# Altium PCB PCB1.PcbDoc (part 2 of 2)
Units mil, origin at the board's own origin, x right, y up, seen from the top; angles counter-clockwise.
Board outline 12061.74 x 5475 mil, 2 copper layers (Top Layer, Bottom Layer); 155 components, 105 nets, 597 pads, 54 vias.
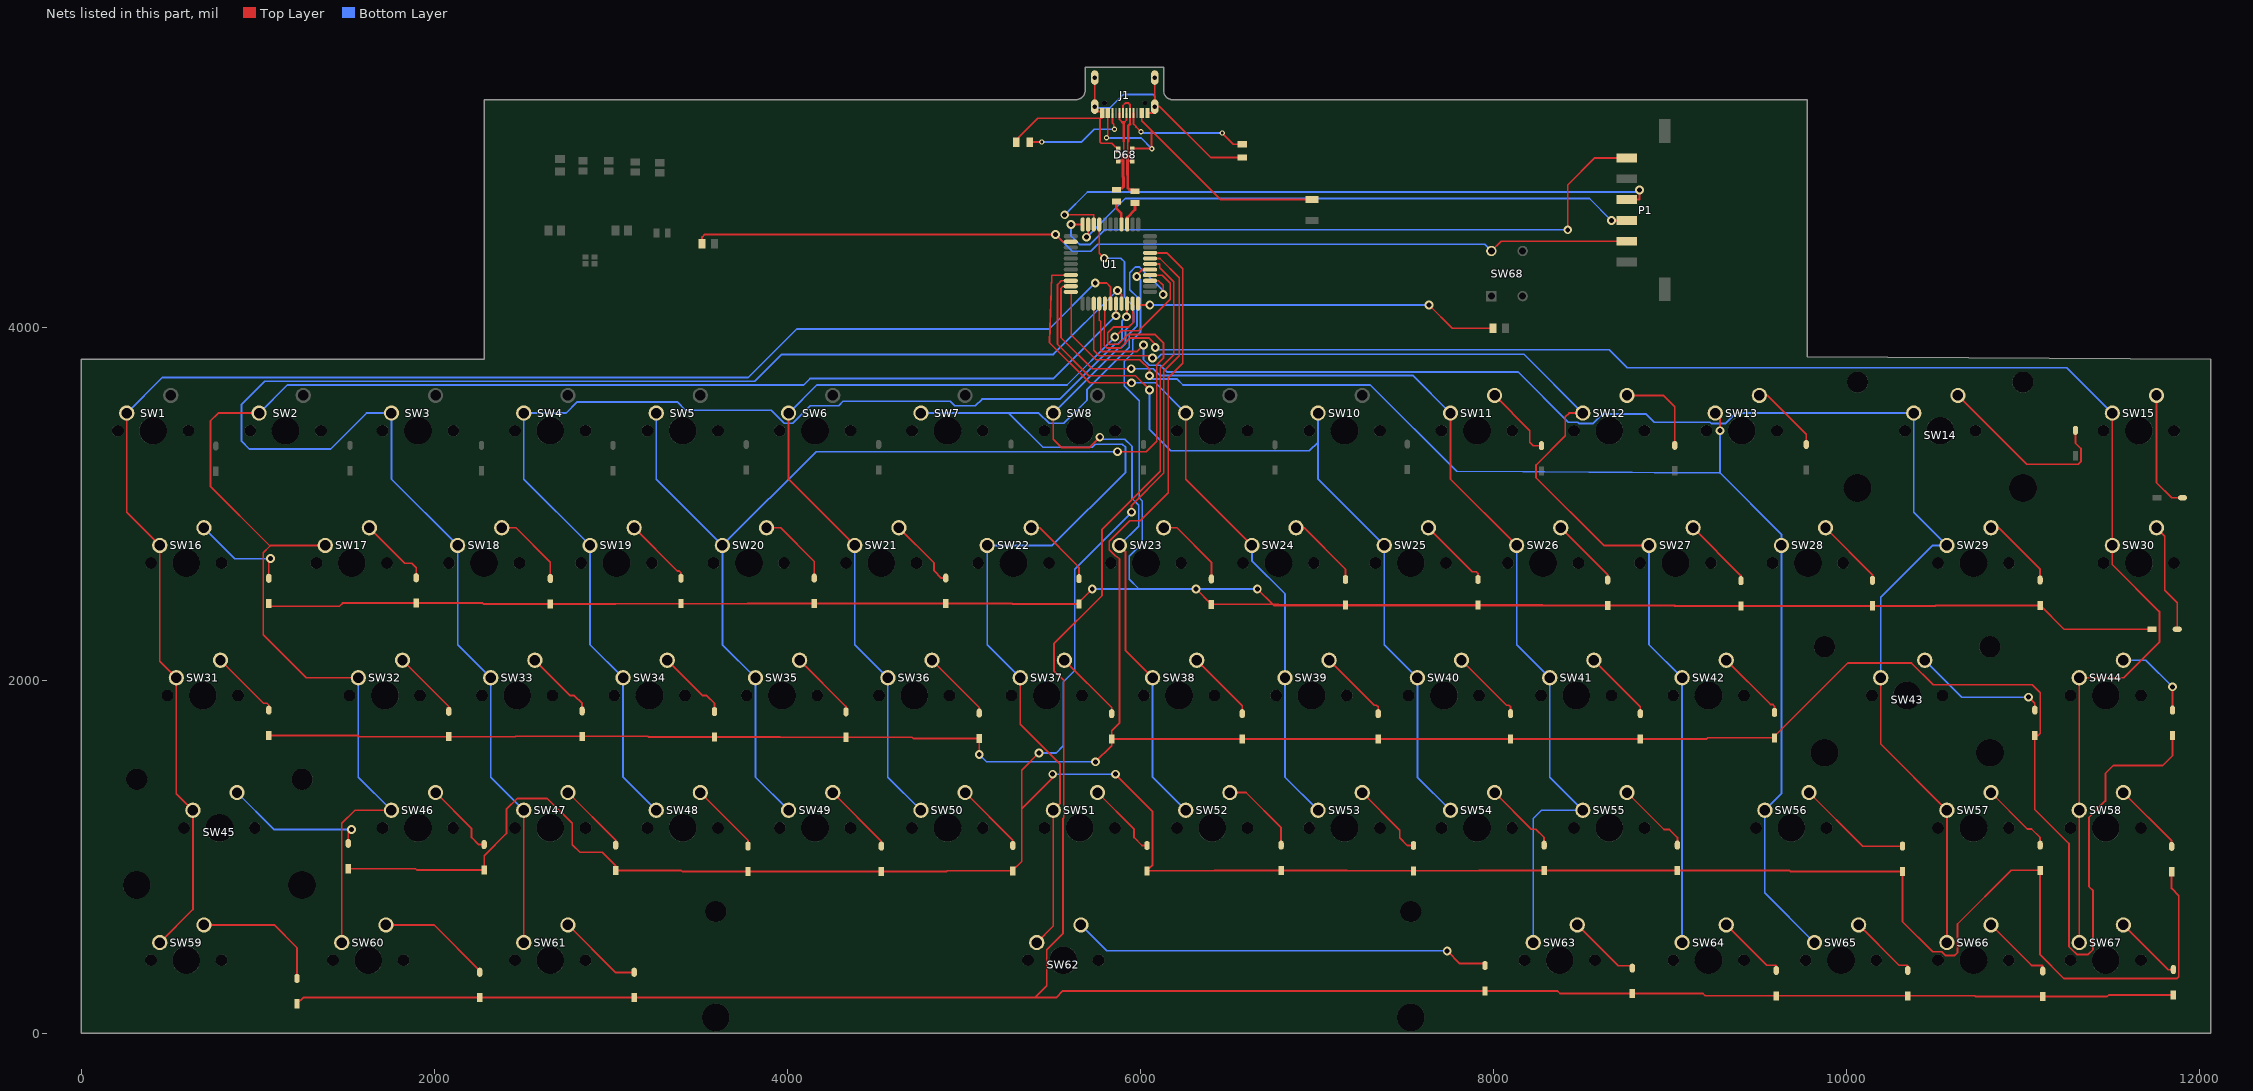
[diagram p2: the nets of this part, all layers, seen from the top]

## Via types
v1: diameter 50, hole 28, Top Layer to Bottom Layer, 48 vias
v2: diameter 30, hole 15, Top Layer to Bottom Layer, 6 vias

## Nets (pads, with @x,y where several pads share a name; then routed paths per layer and width w, separated by ;. In a path a pad name is that pad's centre, name@x,y a point inside that pad or via, vN(x,y) a via of type N, cw(c..) or ccw(c..) an arc to the next point about the centre after c; other vN are vias at no path point) (continued)
NetD11_2: D11.2 SW11.1 | length 421.7
  Top Layer w10: SW11.1@8005.75,3614.71 8205.31,3415.15 8205.31,3350 8225.31,3330 D11.2@8271.31,3330
NetD12_2: D12.2 SW12.1 | length 515.6
  Top Layer w10: SW12.1@8755.71,3614.71 8961.6,3614.71 9026.31,3550 D12.2@9026.31,3331.85
NetD13_2: D13.2 SW13.1 | length 414.3
  Top Layer w10: SW13.1@9505.66,3614.71 9550.66,3614.71 9771.31,3394.05 D13.2@9771.31,3336.85
NetD14_2: D14.2 SW14.1 | length 1054.1
  Top Layer w10: SW14.1@10630.59,3614.71 11020.3,3225 11312.31,3225 11327.31,3240 11327.31,3314 11296.31,3345 D14.2@11296.31,3416.85
NetD15_2: D15.2 SW15.1 | length 677.1
  Top Layer w10: SW15.1@11755.52,3614.71 11755.52,3120.8 11841.31,3035 D15.2@11903.16,3035
NetD16_1: D16.1 D17.1 D18.1 D19.1 D20.1 D21.1 D22.1 D23.1 D24.1 D25.1 D26.1 D27.1 D28.1 D29.1 D30.1 U1.38 | length 16335.3
  Top Layer w10: D16.1@1061.31,2435 1061.31,2420.38 1461.69,2420.38 1479.46,2438.15 D17.1@1896.31,2438.15 2273.31,2438.15 2278.31,2433.15 D18.1@2656.31,2433.15 3025.31,2433.15 3027.16,2435 D19.1@3396.31,2435 3772.31,2435 3773.61,2436.3 D20.1@4151.31,2436.3 D21.1@4896.31,2436.3 5271.31,2436.3 5274.46,2433.15 D22.1@5651.31,2433.15 5651.31,2443 v1(5726.31,2518) ; v1(5978.31,4289) 5978.31,4297 6008.82,4327.5 U1.38@6053.72,4327.5 ; v1(6314.61,2518) D23.1@6401.31,2431.3 6748.01,2431.3 ; v1(6661.31,2518) 6748.01,2431.3 ; D28.1@10146.34,2421 10505.31,2425 ; D30.1@11729.46,2290 11231.31,2290 D29.1@11096.31,2425 10505.31,2425 ; 6748.01,2431.3 6754.31,2425 8279.46,2425 ; 6748.01,2431.3 6779.31,2431.3 6782.46,2428.15 D24.1@7161.31,2428.15 D25.1@7911.31,2428.15 8276.31,2428.15 8279.46,2425 ; 8279.46,2425 D26.1@8646.31,2425 9021.31,2425 ; 9021.31,2425 9025.01,2421.3 9029.01,2421.3 ; 9021.31,2425 9025.31,2425 9029.01,2421.3 ; 9029.01,2421.3 D27.1@9401.31,2421.3 9772.31,2421.3 9774.16,2423.15 D28.1@10146.31,2423.15 D28.1@10146.31,2421 ; 9029.01,2421.3 9029.31,2421 D28.1@10146.31,2421 ; D28.1@10146.31,2421 10501.31,2421 10505.31,2425
  Bottom Layer w10: v1(5726.31,2518) 5991.31,2518 ; v1(5978.31,4289) 6000.31,4267 6000.31,3976.13 5955.35,3931.17 5955.35,3854.85 5907.31,3806.82 5907.31,3670 5992.31,3585 5992.31,3033.65 6009.31,3016.65 6009.31,2775.77 5936.31,2702.77 5936.31,2573 5991.31,2518 ; v1(6661.31,2518) v1(6314.61,2518) 5991.31,2518
NetD16_2: D16.2 SW16.1 | length 564
  Top Layer w10: D16.2@1061.31,2578.7 1061.31,2681 v1(1070.31,2690)
  Bottom Layer w10: SW16.1@693.71,2864.76 868.47,2690 v1(1070.31,2690)
NetD17_2: D17.2 SW17.1 | length 415.6
  Top Layer w10: SW17.1@1631.15,2864.76 1832.31,2663.6 1871.31,2663.6 1896.31,2638.6 D17.2@1896.31,2581.85
NetD18_2: D18.2 SW18.1 | length 449
  Top Layer w10: SW18.1@2381.11,2864.76 2461.56,2864.76 2656.31,2670 D18.2@2656.31,2576.85
NetD19_2: D19.2 SW19.1 | length 402.1
  Top Layer w10: SW19.1@3131.06,2864.76 3375.81,2620.01 3386.3,2620.01 3396.31,2610 D19.2@3396.31,2578.7
NetD20_2: D20.2 SW20.1 | length 443.3
  Top Layer w10: SW20.1@3881.01,2864.76 3960.56,2864.76 4151.31,2674 D20.2@4151.31,2580
NetD21_2: D21.2 SW21.1 | length 409.3
  Top Layer w10: SW21.1@4630.97,2864.76 4830.31,2665.41 4830.31,2621 4871.31,2580 D21.2@4896.31,2580
NetD22_2: D22.2 SW22.1 | length 427.4
  Top Layer w10: SW22.1@5380.92,2864.76 5427.92,2864.76 5651.31,2641.36 D22.2@5651.31,2576.85
NetD23_2: D23.2 SW23.1 | length 446.1
  Top Layer w10: SW23.1@6130.87,2864.76 6206.56,2864.76 6401.31,2670 D23.2@6401.31,2575
NetD24_2: D24.2 SW24.1 | length 435.9
  Top Layer w10: SW24.1@6880.82,2864.76 6926.56,2864.76 7161.31,2630 D24.2@7161.31,2571.85
NetD25_2: D25.2 SW25.1 | length 421.9
  Top Layer w10: SW25.1@7630.78,2864.76 7879.53,2616 7901.31,2616 7911.31,2606 D25.2@7911.31,2571.85
NetD26_2: D26.2 SW26.1 | length 406.1
  Top Layer w10: SW26.1@8380.73,2864.76 8646.31,2599.17 D26.2@8646.31,2568.7
NetD27_2: D27.2 SW27.1 | length 411.9
  Top Layer w10: SW27.1@9130.68,2864.76 9401.31,2594.13 D27.2@9401.31,2565
NetD28_2: D28.2 SW28.1 | length 408
  Top Layer w10: SW28.1@9880.63,2864.76 10146.31,2599.08 D28.2@10146.31,2566.85
NetD29_2: D29.2 SW29.1 | length 436.8
  Top Layer w10: SW29.1@10818.08,2864.76 10861.56,2864.76 11096.31,2630 D29.2@11096.31,2568.7
NetD30_2: D30.2 SW30.1 | length 623.5
  Top Layer w10: SW30.1@11755.52,2864.76 11802.31,2817.96 11802.31,2512 11873.16,2441.15 D30.2@11873.16,2290
NetD31_1: D31.1 D32.1 D33.1 D34.1 D35.1 D36.1 D37.1 D38.1 D39.1 D40.1 D41.1 D42.1 D43.1 D44.1 U1.41 | length 16912.1
  Top Layer w10: D31.1@1061.31,1688.15 1567.31,1688.15 1574.16,1681.3 D32.1@2081.31,1681.3 2457.31,1681.3 2459.16,1683.15 D33.1@2836.31,1683.15 3209.31,1683.15 3212.46,1680 D34.1@3586.31,1680 3957.31,1680 3959.16,1678.15 D35.1@4331.31,1678.15 4705.31,1678.15 4712.16,1671.3 D36.1@5086.31,1671.3 v1(5086.31,1580) ; v1(5744.31,1539) 5836.31,1631 D37.1@5836.31,1668.15 ; U1.41@6053.72,4421.99 6149.07,4421.99 6239.55,4331.51 6239.55,3796.92 6157.31,3714.68 6157.31,3063.56 5998.03,2904.28 5937.94,2904.28 5822.56,2788.91 5822.56,2740.6 5856.72,2706.45 5880.31,2690 5880.31,1758 5836.31,1714 D37.1@5836.31,1668.15 ; D44.1@11846.31,1688.15 11846.31,1573 11791.31,1518 11511.31,1518 11466.31,1473 11466.31,1317.68 11373.31,1224.68 11373.31,832 11396.31,809 11396.31,475.75 11368.56,448 11303.47,448 11291.83,459.64 11290.83,459.64 11259.72,490.75 11259.72,1075.59 11066.31,1269 D43.1@11066.31,1688.15 11085.46,1688.15 11097.31,1700 11097.31,1930 11052.31,1975 10491.31,1975 10367.31,2099 10006.31,2099 9591.31,1684 D42.1@9591.31,1675 9214.16,1675 9207.31,1668.15 D41.1@8831.31,1668.15 D40.1@8096.31,1668.15 D39.1@7346.31,1668.15 D38.1@6576.31,1668.15 D37.1@5836.31,1668.15
  Bottom Layer w10: v1(5086.31,1580) 5127.31,1539 v1(5744.31,1539)
NetD31_2: D31.2 SW31.1 | length 408.1
  Top Layer w10: SW31.1@787.46,2114.8 1031.26,1871 1051.31,1871 1061.31,1861 D31.2@1061.31,1831.85
NetD32_2: D32.2 SW32.1 | length 398.6
  Top Layer w10: SW32.1@1818.64,2114.8 2081.31,1852.13 D32.2@2081.31,1825
NetD33_2: D33.2 SW33.1 | length 412.3
  Top Layer w10: SW33.1@2568.6,2114.8 2769.31,1914.09 2792.22,1914.09 2836.31,1870 D33.2@2836.31,1826.85
NetD34_2: D34.2 SW34.1 | length 415.5
  Top Layer w10: SW34.1@3318.55,2114.8 3519.31,1914.04 3542.27,1914.04 3586.31,1870 D34.2@3586.31,1823.7
NetD35_2: D35.2 SW35.1 | length 401.8
  Top Layer w10: SW35.1@4068.5,2114.8 4331.31,1851.99 D35.2@4331.31,1821.85
NetD36_2: D36.2 SW36.1 | length 410.8
  Top Layer w10: SW36.1@4818.45,2114.8 5086.31,1846.95 D36.2@5086.31,1815
NetD37_2: D37.2 SW37.1 | length 413.9
  Top Layer w10: SW37.1@5568.41,2114.8 5836.31,1846.9 D37.2@5836.31,1811.85
NetD38_2: D38.2 SW38.1 | length 409.8
  Top Layer w10: SW38.1@6318.36,2114.8 6576.31,1856.85 D38.2@6576.31,1811.85
NetD39_2: D39.2 SW39.1 | length 425.8
  Top Layer w10: SW39.1@7068.31,2114.8 7323.12,1860 7336.31,1860 7346.31,1850 D39.2@7346.31,1811.85
NetD40_2: D40.2 SW40.1 | length 425.9
  Top Layer w10: SW40.1@7818.26,2114.8 8073.07,1860 8086.31,1860 8096.31,1850 D40.2@8096.31,1811.85
NetD41_2: D41.2 SW41.1 | length 411.9
  Top Layer w10: SW41.1@8568.22,2114.8 8831.31,1851.71 D41.2@8831.31,1811.85
NetD42_2: D42.2 SW42.1 | length 416.5
  Top Layer w10: SW42.1@9318.17,2114.8 9568.97,1864 9581.31,1864 9591.31,1854 D42.2@9591.31,1818.7
NetD43_2: D43.2 SW43.1 | length 762.8
  Top Layer w10: v1(11031.31,1905) 11066.31,1870 D43.2@11066.31,1831.85
  Bottom Layer w10: SW43.1@10443.1,2114.8 10652.9,1905 v1(11031.31,1905)
NetD44_2: D44.2 SW44.1 | length 472.9
  Top Layer w10: D44.2@11846.31,1831.85 v1(11846.31,1964)
  Bottom Layer w10: SW44.1@11568.03,2114.8 11695.51,2114.8 v1(11846.31,1964)
NetD45_1: D45.1 D46.1 D47.1 D48.1 D49.1 D50.1 D51.1 D52.1 D53.1 D54.1 D55.1 D56.1 D57.1 D58.1 U1.40 | length 17299.1
  Top Layer w10: D45.1@1511.31,933.15 1892.31,933.15 1899.16,926.3 D46.1@2281.31,926.3 2281.31,1007 2407.31,1133 2407.31,1270 2468.31,1331 2639.31,1331 2780.31,1190 2780.31,1070 2824.31,1026 2951.31,1026 3026.31,951 D47.1@3026.31,923.15 3398.31,923.15 3403.31,918.15 D48.1@3776.31,918.15 D49.1@4531.31,918.15 4901.31,918.15 4904.46,921.3 D50.1@5276.31,921.3 5276.31,924 5326.31,974 5326.31,1273 ; v1(5424.31,1589) 5326.31,1491 5326.31,1273 ; v1(5502.31,1469) 5522.31,1469 5326.31,1273 ; v1(5857.31,1469) 6067.31,1259 6067.31,952.3 D51.1@6036.31,921.3 6415.31,921.3 6417.16,923.15 D52.1@6796.31,923.15 7170.31,923.15 7172.16,921.3 D53.1@7546.31,921.3 7915.31,921.3 7917.16,923.15 D54.1@8286.31,923.15 D55.1@9041.31,923.15 9676.31,923.15 9681.31,918.15 D56.1@10316.31,918.15 10316.31,634.36 10487.31,463.36 10538.15,463.36 10559.52,442 10612.61,442 10628.33,457.73 10628.33,620.02 10932.31,924 11096.31,924 D57.1@11096.31,923.15 11096.31,446 11231.31,311 11871.31,311 11882.31,322 11882.31,781 11841.31,822 D58.1@11841.31,916.3 ; v1(5949.31,2953) 5949.31,2993 6131.31,3175 6131.31,3751 6219.55,3839.24 6219.55,4281.26 6110.31,4390.5 U1.40@6053.72,4390.5
  Bottom Layer w10: v1(5424.31,1589) 5522.31,1589 5562.31,1629 5562.31,1991 5627.31,2056 5627.31,2631 v1(5949.31,2953) ; v1(5502.31,1469) v1(5857.31,1469)
NetD45_2: D45.2 SW45.1 | length 822.6
  Top Layer w10: D45.2@1511.31,1076.85 1511.31,1137 v1(1530.31,1156)
  Bottom Layer w10: SW45.1@881.2,1364.85 1090.05,1156 v1(1530.31,1156)
NetD46_2: D46.2 SW46.1 | length 427
  Top Layer w10: SW46.1@2006.13,1364.85 2210.31,1160.67 2210.31,1110 2250.31,1070 D46.2@2281.31,1070
NetD47_2: D47.2 SW47.1 | length 409.9
  Top Layer w10: SW47.1@2756.08,1364.85 3026.31,1094.62 D47.2@3026.31,1066.85
NetD48_2: D48.2 SW48.1 | length 415
  Top Layer w10: SW48.1@3506.04,1364.85 3776.31,1094.57 D48.2@3776.31,1061.85
NetD49_2: D49.2 SW49.1 | length 417
  Top Layer w10: SW49.1@4255.99,1364.85 4531.31,1089.53 D49.2@4531.31,1061.85
NetD50_2: D50.2 SW50.1 | length 411.8
  Top Layer w10: SW50.1@5005.94,1364.85 5276.31,1094.48 D50.2@5276.31,1065
NetD51_2: D51.2 SW51.1 | length 432.4
  Top Layer w10: SW51.1@5755.89,1364.85 5963.31,1157.43 5963.31,1110 6008.31,1065 D51.2@6036.31,1065
NetD52_2: D52.2 SW52.1 | length 471.9
  Top Layer w10: SW52.1@6505.85,1364.85 6597.31,1364.85 6796.31,1165.85 D52.2@6796.31,1066.85
NetD53_2: D53.2 SW53.1 | length 440.7
  Top Layer w10: SW53.1@7255.8,1364.85 7468.31,1152.34 7468.31,1108 7511.31,1065 D53.2@7546.31,1065
NetD54_2: D54.2 SW54.1 | length 429.3
  Top Layer w10: SW54.1@8005.75,1364.85 8213.31,1157.29 8239.02,1157.29 8286.31,1110 D54.2@8286.31,1066.85
NetD55_2: D55.2 SW55.1 | length 434.3
  Top Layer w10: SW55.1@8755.71,1364.85 8965.31,1155.24 8996.07,1155.24 9041.31,1110 D55.2@9041.31,1066.85
NetD56_2: D56.2 SW56.1 | length 656.1
  Top Layer w10: SW56.1@9786.89,1364.85 10090.74,1061 10316.31,1061 D56.2@10316.31,1061.85
NetD57_2: D57.2 SW57.1 | length 426.9
  Top Layer w10: SW57.1@10818.08,1364.85 11024.31,1158.61 11047.7,1158.61 11096.31,1110 D57.2@11096.31,1066.85
NetD58_2: D58.2 SW58.1 | length 418
  Top Layer w10: SW58.1@11568.03,1364.85 11841.31,1091.57 D58.2@11841.31,1060
NetD59_1: D59.1 D60.1 D61.1 D62.1 D63.1 D64.1 D65.1 D66.1 D67.1 U1.39 | length 15292.3
  Top Layer w10: D59.1@1221.31,168.15 1256.31,203.15 D60.1@2256.31,203.15 D61.1@3131.31,203.15 5401.46,203.15 ; U1.39@6053.72,4359 6109.31,4359 6109.31,4337.18 6188.31,4258.18 6188.31,3845 6111.31,3768 6111.31,3185 5782.31,2856 5782.31,2481 5509.31,2208 5509.31,2055 5564.31,2000 5564.31,1221 5561.31,1218 5561.31,568.18 5468.31,475.18 5468.31,270 5401.46,203.15 ; D67.1@11851.31,218.15 11484.46,218.15 11476.31,210 D66.1@11111.31,210 10729.46,210 10726.31,213.15 D65.1@10346.31,213.15 D64.1@9601.31,213.15 9199.46,213.15 9186.31,226.3 D63.1@8786.31,226.3 8376.31,226.3 8361.31,241.3 D62.1@7951.31,241.3 5559.46,241.3 5521.31,203.15 5401.46,203.15
NetD59_2: D59.2 SW59.1 | length 754.6
  Top Layer w10: SW59.1@693.71,614.9 1091.41,614.9 1221.31,485 D59.2@1221.31,311.85
NetD60_2: D60.2 SW60.1 | length 647.8
  Top Layer w10: SW60.1@1724.9,614.9 1997.41,614.9 2256.31,356 D60.2@2256.31,346.85
NetD61_2: D61.2 SW61.1 | length 487.5
  Top Layer w10: SW61.1@2756.08,614.9 3024.98,346 3131.31,346 D61.2@3131.31,346.85
NetD62_2: D62.2 SW62.1 | length 2390.8
  Top Layer w10: v1(7737.31,468) 7809.31,396 7951.31,396 D62.2@7951.31,385
  Bottom Layer w10: SW62.1@5662.15,614.9 5809.05,468 v1(7737.31,468)
NetD63_2: D63.2 SW63.1 | length 421.5
  Top Layer w10: SW63.1@8474.47,614.9 8705.37,384 8786.31,384 D63.2@8786.31,370
NetD64_2: D64.2 SW64.1 | length 407.1
  Top Layer w10: SW64.1@9318.17,614.9 9547.07,386 9601.31,386 D64.2@9601.31,356.85
NetD65_2: D65.2 SW65.1 | length 402.2
  Top Layer w10: SW65.1@10068.12,614.9 10297.02,386 10346.31,386 D65.2@10346.31,356.85
NetD66_2: D66.2 SW66.1 | length 419.8
  Top Layer w10: SW66.1@10818.08,614.9 11047.97,385 11111.31,385 D66.2@11111.31,353.7
NetD67_2: D67.2 SW67.1 | length 389.3
  Top Layer w10: SW67.1@11568.03,614.9 11821.93,361 11851.31,361 D67.2@11851.31,361.85
NetD68_1: D68.1 J1.A1B12 J1.B1A12 J1.S1 J1.S2 J1.S3 J1.S4 R5.1 R6.2 | length 2384.7
  Top Layer w10: R5.1@5296.12,5050 5296.12,5063.8 5417.57,5185.26 5770.67,5185.26 ; J1.S4@5740.45,5415.59 J1.S2@5740.45,5251.02 5740.45,5223 5782.57,5223 J1.B1A12@5782.57,5215 5782.57,5185.26 5770.67,5185.26 ; D68.1@5873.94,5006.53 5873.94,5012.43 5865.16,5021.21 5859.26,5021.21 5837.11,5043.36 5776.53,5043.36 5770.67,5049.22 5770.67,5185.26 ; J1.A1B12@6038.48,5215 6080.6,5215 J1.S1@6080.6,5251.02 ; J1.S3@6080.6,5415.59 J1.S1@6080.6,5251.02 ; R6.2@6576.31,4962.4 6397.91,4962.4 6109.29,5251.02 J1.S1@6080.6,5251.02
  Bottom Layer w10: J1.S2@5740.45,5251.02 5740.45,5243 5826.31,5243 5903.31,5320 6070.6,5320 6080.6,5310 J1.S1@6080.6,5251.02
NetJ1_A5: J1.A5 R6.1 | length 727.8
  Top Layer w10: J1.A5@5959.74,5215 5959.74,5153.57 5974.31,5139 5974.31,5136 v2(6002.31,5108) ; v2(6462.31,5101) 6525.71,5037.6 R6.1@6576.31,5037.6
  Bottom Layer w10: v2(6002.31,5108) 6009.31,5101 v2(6462.31,5101)
NetJ1_B5: J1.B5 R5.2 | length 609.1
  Top Layer w10: R5.2@5371.31,5050 v2(5440.31,5050) ; J1.B5@5841.63,5215 5841.63,5157 5848.48,5150.14 5848.48,5125.83 v2(5852.31,5122)
  Bottom Layer w10: v2(5440.31,5050) 5664.31,5050 5737.31,5123 5851.31,5123 v2(5852.31,5122)
NetP1_1: P1.1 U1.11 | length 3650.8
  Top Layer w10: v1(5606.31,4583) 5671.83,4583 U1.11@5671.83,4583.41 ; v1(8420.31,4553) 8420.31,4807 8573.59,4960.28 P1.1@8754.74,4960.28
  Bottom Layer w10: v1(5606.31,4583) 5606.31,4518 5653.91,4470.4 5714.71,4470.4 5797.31,4553 v1(8420.31,4553)
NetP1_3: P1.3 U1.9 | length 3662.2
  Top Layer w10: v1(5570.31,4638) 5609.31,4638 5610.08,4638.77 5733.31,4638.77 5734.82,4637.25 U1.9@5734.82,4583.41 ; P1.3@8754.74,4724.06 8827.31,4724.06 v1(8827.31,4779)
  Bottom Layer w10: v1(5570.31,4638) 5699.31,4767 8815.31,4767 v1(8827.31,4779)
NetP1_4: P1.4 U1.10 | length 3278.7
  Top Layer w10: v1(5694.31,4511) 5703.33,4520.02 U1.10@5703.33,4583.41 ; v1(8667.37,4605.95) P1.4@8754.74,4605.95
  Bottom Layer w10: v1(5694.31,4511) 5913.31,4730 8543.31,4730 v1(8667.37,4605.95)
NetP1_5: P1.5 R1.1 SW68.2 U1.13 | length 5480.3
  Top Layer w10: R1.1@3515.88,4475 3515.88,4511.57 3531.31,4527 v1(5518.31,4527) 5560.33,4484.98 U1.13@5604.9,4484.98 ; SW68.2@7987.73,4432.95 8042.61,4487.83 P1.5@8754.74,4487.83
  Bottom Layer w10: v1(5518.31,4527) 5613.31,4432 5717.25,4432 5756.81,4471.57 7949.11,4471.57 SW68.2@7987.73,4432.95
NetR2_2: R2.2 U1.33 | length 2071.4
  Top Layer w10: U1.33@5986.79,4134.59 5986.79,4127 v1(6052.31,4127) ; v1(7634.31,4127) 7766.31,3995 R2.2@7995.88,3995
  Bottom Layer w10: v1(6052.31,4127) v1(7634.31,4127)
NetSW1_2: SW1.2 SW16.2 SW31.2 SW45.2 SW59.2 U1.28 | length 9215.8
  Top Layer w10: SW1.2@256.23,3514.71 256.23,2952.24 SW16.2@443.71,2764.76 443.71,2108.55 SW31.2@537.46,2014.8 537.46,1358.59 SW45.2@631.2,1264.85 631.2,702.39 SW59.2@443.71,514.9 ; v1(5743.31,4252) 5807.31,4252 5829.31,4230 U1.28@5829.31,4134.59
  Bottom Layer w10: SW1.2@256.23,3514.71 457.52,3716 3777.31,3716 4052.31,3991 5482.31,3991 v1(5743.31,4252)
NetSW2_2: SW2.2 SW17.2 SW32.2 SW46.2 SW60.2 U1.29 | length 9894.5
  Top Layer w10: SW2.2@1006.18,3514.71 775.02,3514.71 730.31,3470 730.31,3099 1067.81,2761.5 ; SW60.2@1474.9,514.9 1474.9,1190 1549.75,1264.85 SW46.2@1756.13,1264.85 ; SW32.2@1568.64,2014.8 1274.51,2014.8 1030.31,2259 1030.31,2724 1067.81,2761.5 ; v1(5860.31,4066) 5860.81,4066.5 U1.29@5860.81,4134.59 ; 1067.81,2761.5 SW17.2@1381.15,2764.76 1071.07,2764.76 1067.81,2761.5
  Bottom Layer w10: SW2.2@1006.18,3514.71 1165.47,3674 4091.31,3674 4127.31,3710 5504.31,3710 v1(5860.31,4066) ; SW32.2@1568.64,2014.8 1568.64,1452.34 SW46.2@1756.13,1264.85
NetSW3_2: SW3.2 SW18.2 SW33.2 SW47.2 SW61.2 U1.30 | length 9785.4
  Top Layer w10: SW61.2@2506.08,514.9 SW47.2@2506.08,1264.85 ; v1(5869.31,4210) 5892.3,4187.01 U1.30@5892.3,4134.59
  Bottom Layer w10: SW47.2@2506.08,1264.85 2318.6,1452.34 SW33.2@2318.6,2014.8 2131.11,2202.29 SW18.2@2131.11,2764.76 1756.13,3139.73 SW3.2@1756.13,3514.71 1615.02,3514.71 1411.31,3311 951.31,3311 907.31,3355 907.31,3564 1038.31,3695 3814.31,3695 3966.31,3847 5506.31,3847 v1(5869.31,4210)
NetSW4_2: SW4.2 SW19.2 SW34.2 SW48.2 U1.31 | length 6460.2
  Top Layer w10: v1(5920.31,4060) 5923.8,4063.49 U1.31@5923.8,4134.59
  Bottom Layer w10: SW48.2@3256.04,1264.85 3068.55,1452.34 SW34.2@3068.55,2014.8 2881.06,2202.29 SW19.2@2881.06,2764.76 2506.08,3139.73 SW4.2@2506.08,3514.71 2745.02,3514.71 2808.31,3578 3375.31,3578 3422.31,3531 3907.24,3531 3981.84,3456.4 4030.14,3456.4 4129.74,3556 4289.31,3556 4314.31,3581 4922.31,3581 4947.31,3556 5064.31,3556 5102.31,3594 5543.31,3594 5854.31,3905 5871.31,3905 5894.31,3928 5894.31,4034 v1(5920.31,4060)
NetSW5_2: SW5.2 SW20.2 SW35.2 SW49.2 U1.32 | length 6535.1
  Top Layer w10: v1(5870.31,3296) 6031.31,3296 6091.31,3356 6091.31,3788 6130.31,3827 6130.31,3910 6079.81,3960.5 5930.81,3960.5 5875.31,3905 5819.79,3905 5814.31,3910.48 5814.31,3970 5847.31,4003 5933.31,4003 5960.31,4030 5960.31,4075.98 5955.3,4081 U1.32@5955.3,4134.59
  Bottom Layer w10: SW5.2@3256.04,3514.71 3256.04,3139.73 SW20.2@3631.01,2764.76 ; SW49.2@4005.99,1264.85 3818.5,1452.34 SW35.2@3818.5,2014.8 3631.01,2202.29 SW20.2@3631.01,2764.76 ; v1(5870.31,3296) 4162.26,3296 SW20.2@3631.01,2764.76
NetSW6_2: SW6.2 SW21.2 SW36.2 SW50.2 U1.37 | length 5213.7
  Top Layer w10: SW6.2@4005.99,3514.71 4005.99,3139.73 SW21.2@4380.97,2764.76 ; v1(5854.31,3945) 5889.81,3980.5 5988.81,3980.5 6168.31,4160 6168.31,4249.9 6122.2,4296.01 U1.37@6053.72,4296.01
  Bottom Layer w10: SW6.2@4005.99,3514.71 4165.28,3674 5583.31,3674 v1(5854.31,3945) ; SW21.2@4380.97,2764.76 4380.97,2202.29 SW36.2@4568.45,2014.8 4568.45,1452.34 SW50.2@4755.94,1264.85
NetSW7_2: SW7.2 SW22.2 SW37.2 SW51.2 SW62.2 U1.36 | length 6622.7
  Top Layer w10: SW37.2@5318.41,2014.8 5318.41,1751.91 5544.31,1526 5544.31,1303.27 SW51.2@5505.89,1264.85 5505.89,608.64 SW62.2@5412.15,514.9 ; U1.36@6053.72,4264.51 6101.8,4264.51 6128.31,4238 v1(6128.31,4186)
  Bottom Layer w10: SW7.2@4755.94,3514.71 5253.64,3514.71 ; SW37.2@5318.41,2014.8 5130.92,2202.29 SW22.2@5130.92,2764.76 5500.07,2764.76 5915.31,3180 5915.31,3320 5897.31,3338 5743.31,3338 5726.28,3320.97 5447.38,3320.97 5253.64,3514.71 ; v1(6128.31,4186) 6128.31,4207 5993.31,4342 5970.31,4342 5938.31,4310 5938.31,4214.05 5980.31,4172.05 5980.31,4010 5935.35,3965.04 5935.35,3888.04 5697.31,3650 5697.31,3588.7 5565.01,3456.4 5481.74,3456.4 5423.43,3514.71 5253.64,3514.71
NetSW8_2: SW8.2 SW23.2 SW38.2 SW52.2 U1.8 | length 4337.4
  Top Layer w10: SW8.2@5505.89,3514.71 5505.89,3365.42 5551.31,3320 5711.31,3320 v1(5769.31,3378) ; U1.8@5766.32,4583.41 5766.32,4419.99 v1(5794.31,4392) ; SW23.2@5880.87,2764.76 5915.31,2730.32 5915.31,2167.85 SW38.2@6068.36,2014.8
  Bottom Layer w10: SW8.2@5505.89,3514.71 5876.19,3885 5891.31,3885 5914.31,3908 5914.31,3984 5960.31,4030 5960.31,4120.55 5909.31,4171.55 5909.31,4371 5888.31,4392 v1(5794.31,4392) ; v1(5769.31,3378) 5781.31,3366 5911.31,3366 5951.31,3326 5951.31,3031 5989.31,2993 5989.31,2873.2 SW23.2@5880.87,2764.76 ; SW38.2@6068.36,2014.8 6068.36,1452.34 SW52.2@6255.85,1264.85
NetSW9_2: SW9.2 SW24.2 SW39.2 SW53.2 U1.19 | length 3988.2
  Top Layer w10: U1.19@5604.9,4296.01 5496.31,4296.01 5484.31,3914 5712.31,3686 v1(5948.31,3686) ; SW9.2@6255.85,3514.71 6255.85,3139.73 SW24.2@6630.82,2764.76
  Bottom Layer w10: v1(5948.31,3686) 6084.56,3686 SW9.2@6255.85,3514.71 ; SW24.2@6630.82,2764.76 6630.82,2677.49 6818.31,2490 SW39.2@6818.31,2014.8 6818.31,1452.34 SW53.2@7005.8,1264.85
NetSW10_2: SW10.2 SW25.2 SW40.2 SW54.2 U1.20 | length 4862.7
  Top Layer w10: U1.20@5604.9,4264.51 5551.31,4264.51 5529.31,4242.51 5529.31,3904 5707.31,3726 5971.31,3726 v1(6051.31,3646)
  Bottom Layer w10: v1(6051.31,3646) 6051.31,3420 6170.31,3301 6956.8,3301 7005.8,3350 ; SW10.2@7005.8,3514.71 7005.8,3350 ; SW54.2@7755.75,1264.85 7568.26,1452.34 SW40.2@7568.26,2014.8 7380.78,2202.29 SW25.2@7380.78,2764.76 7005.8,3139.73 7005.8,3350
NetSW11_2: SW11.2 SW26.2 SW41.2 SW55.2 SW63.2 U1.21 | length 6287.1
  Top Layer w10: U1.21@5604.9,4233.02 5561.31,4233.02 5549.55,4221.25 5549.55,3941.78 5725.32,3766 v1(5947.31,3766) ; SW11.2@7755.75,3514.71 7755.75,3139.73 SW26.2@8130.73,2764.76
  Bottom Layer w10: v1(5947.31,3766) 6071.31,3766 6109.31,3728 7542.46,3728 SW11.2@7755.75,3514.71 ; SW26.2@8130.73,2764.76 8130.73,2202.29 SW41.2@8318.22,2014.8 8318.22,1452.34 SW55.2@8505.71,1264.85 8271.31,1264.85 8224.47,1218.01 SW63.2@8224.47,514.9
NetSW12_2: SW12.2 SW27.2 SW42.2 SW64.2 U1.25 | length 6848.2
  Top Layer w10: U1.25@5734.82,4134.59 5734.82,3870 5765.78,3839.05 6056.27,3839.05 v1(6068.31,3827) ; SW12.2@8505.71,3514.71 8428.02,3514.71 8406.31,3493 8406.31,3386 8240.31,3220 8240.31,3149 8624.56,2764.76 SW27.2@8880.68,2764.76
  Bottom Layer w10: v1(6068.31,3827) 6097.31,3827 6118.31,3848 8172.41,3848 SW12.2@8505.71,3514.71 ; SW27.2@8880.68,2764.76 8880.68,2202.29 SW42.2@9068.17,2014.8 SW64.2@9068.17,514.9
NetSW13_2: SW13.2 SW28.2 SW56.2 SW65.2 U1.22 | length 7574.3
  Top Layer w10: U1.22@5604.9,4201.52 5607.31,4201.52 5607.31,3957 5747.31,3817 5996.31,3817 6051.31,3762 v1(6051.31,3726) ; SW13.2@9255.66,3514.71 9283.31,3487.05 v1(9283.31,3415)
  Bottom Layer w10: v1(6051.31,3726) 6070.31,3707 6207.31,3707 6240.31,3674 7301.31,3674 7790.31,3185 9283.31,3175 ; v1(9283.31,3415) 9283.31,3175 ; SW65.2@9818.12,514.9 9536.89,796.13 SW56.2@9536.89,1264.85 9630.63,1358.59 SW28.2@9630.63,2764.76 9630.63,2827.68 9283.31,3175
NetSW14_2: SW14.2 SW29.2 SW43.2 SW57.2 SW66.2 U1.26 | length 8629.1
  Top Layer w10: U1.26@5766.32,4134.59 5766.32,4041.49 5774.31,4033.5 5774.31,3870 5781.31,3863 5979.31,3863 v1(6016.81,3900.5) ; SW43.2@10193.1,2014.8 10193.1,1639.83 SW57.2@10568.08,1264.85 SW66.2@10568.08,514.9
  Bottom Layer w10: v1(6016.81,3900.5) 6016.81,3817.5 6048.31,3786 6111.31,3786 6149.31,3748 8138.31,3748 8423.14,3463.17 8475.78,3463.17 8482.96,3456 8564.31,3456 8617.31,3509 8865.31,3509 8911.14,3463.17 9225.73,3463.17 9232.91,3456 9314.31,3456 9373.02,3514.71 SW14.2@10380.59,3514.71 10380.59,2952.24 SW29.2@10568.08,2764.76 10487.07,2764.76 10193.1,2470.79 SW43.2@10193.1,2014.8
NetSW15_2: SW15.2 SW30.2 SW44.2 SW58.2 SW67.2 U1.27 | length 9611.5
  Top Layer w10: U1.27@5797.82,4134.59 5797.82,4008.5 5794.31,4005 5794.31,3900 5811.31,3883 5883.81,3883 5941.31,3940.5 6046.31,3940.5 6083.31,3903.5 v1(6083.31,3886) ; SW67.2@11318.03,514.9 SW58.2@11318.03,1264.85 SW44.2@11318.03,2014.8 11571.12,2014.8 11772.31,2216 11772.31,2390 11505.52,2656.8 SW30.2@11505.52,2764.76 SW15.2@11505.52,3514.71
  Bottom Layer w10: v1(6083.31,3886) 6096.31,3873 8655.31,3873 8756.31,3772 11248.22,3772 SW15.2@11505.52,3514.71
T_N: R3.2 U1.3 | length 149.9
  Top Layer w10: R3.2@5958.43,4705 R3.2@5968.31,4705
  Top Layer w15: U1.3@5923.8,4583.41 5925.45,4585.06 5925.45,4623.77 5968.31,4666.63 R3.2@5968.31,4705
T_P: R4.2 U1.4 | length 142.1
  Top Layer w15: R4.2@5863.31,4713.5 5863.31,4674.2 5891.25,4646.26 5891.25,4584.46 U1.4@5892.3,4583.41
TR_N: D68.3 J1.A7 J1.B7 R3.1 | length 666.4
  Top Layer w10: J1.A7@5900.68,5215 5900.68,5257.37 5914.31,5271 5931.31,5271 5940.05,5262.26 J1.B7@5940.05,5215 5940.05,5151.49 ; 5927.81,4970.41 5927.81,5054 5929.56,5055.75
  Top Layer w15: 5927.81,4970.41 5925.81,4968.41 5925.81,4952.7 ; 5929.56,5055.75 5929.56,5141 5940.05,5151.49 ; R3.1@5952.68,4772 R3.1@5968.31,4772 5960.47,4779.84 5937.1,4779.84 5928.31,4788.63 5928.31,4861.08 5925.81,4863.58 5925.81,4952.7 ; D68.3@5952.68,4939.6 5948.37,4943.91 5934.6,4943.91 5925.81,4952.7
TR_P: D68.2 J1.A6 J1.B6 R4.1 | length 580.4
  Top Layer w10: J1.B6@5881,5215 5881,5178.31 5896.31,5163 ; 5900.81,4975.23 5905.31,4979.73 5905.31,5054 ; 5904.56,5054.75 5905.31,5054 ; 5906.31,5053 5905.31,5054 ; 5908.31,5163 5920.37,5175.06 J1.A6@5920.37,5215
  Top Layer w15: R4.1@5863.31,4780.5 5871.15,4788.34 5894.52,4788.34 5903.31,4797.13 5903.31,4850.72 5900.81,4853.22 5900.81,4952.7 ; D68.2@5873.94,4939.6 5878.25,4943.91 5892.02,4943.91 5900.81,4952.7 ; 5900.81,4975.23 5900.81,4952.7 ; 5904.56,5054.75 5904.56,5154.75 5896.31,5163 5908.31,5163
VCC: D68.4 F1.1 J1.A4B9 J1.B4A9 | length 1831.3
  Top Layer w10: v2(5807.31,5075) 5807.31,5080.41 5814.07,5087.17 J1.B4A9@5814.07,5215 ; D68.4@5952.68,5014.4 5953.88,5013.2 6063.11,5013.2 v2(6064.31,5012) ; J1.A4B9@6006.98,5215 6006.98,5171 6063.11,5114.88 6453.93,4724.06 F1.1@6971.31,4724.06 ; v2@6061.91,5014.4 6061.91,5113.68
  Bottom Layer w10: v2(5807.31,5075) 5809.31,5073 6003.31,5073 v2(6064.31,5012)
pads on no net: J1. J1.A8 J1.B8 P1.MP1 P1.MP2 SW1.Un1 SW1.Un2 SW1.Un3 SW2.Un1 SW2.Un2 SW2.Un3 SW3.Un1 SW3.Un2 SW3.Un3 SW4.Un1 SW4.Un2 SW4.Un3 SW5.Un1 SW5.Un2 SW5.Un3 SW6.Un1 SW6.Un2 SW6.Un3 SW7.Un1 SW7.Un2 SW7.Un3 SW8.Un1 SW8.Un2 SW8.Un3 SW9.Un1 SW9.Un2 SW9.Un3 SW10.Un1 SW10.Un2 SW10.Un3 SW11.Un1 SW11.Un2 SW11.Un3 SW12.Un1 SW12.Un2 SW12.Un3 SW13.Un1 SW13.Un2 SW13.Un3 SW14.Un1 SW14.Un2 SW14.Un3 SW14.Un4 SW14.Un5 SW14.Un6 SW14.Un7 SW15.Un1 SW15.Un2 SW15.Un3 SW16.Un1 SW16.Un2 SW16.Un3 SW17.Un1 SW17.Un2 SW17.Un3 SW18.Un1 SW18.Un2 SW18.Un3 SW19.Un1 SW19.Un2 SW19.Un3 SW20.Un1 SW20.Un2 SW20.Un3 SW21.Un1 SW21.Un2 SW21.Un3 SW22.Un1 SW22.Un2 SW22.Un3 SW23.Un1 SW23.Un2 SW23.Un3 SW24.Un1 SW24.Un2 SW24.Un3 SW25.Un1 SW25.Un2 SW25.Un3 SW26.Un1 SW26.Un2 SW26.Un3 SW27.Un1 SW27.Un2 SW27.Un3 SW28.Un1 SW28.Un2 SW28.Un3 SW29.Un1 SW29.Un2 SW29.Un3 SW30.Un1 SW30.Un2 SW30.Un3 SW31.Un1 SW31.Un2 SW31.Un3 SW32.Un1 SW32.Un2 SW32.Un3 SW33.Un1 SW33.Un2 SW33.Un3 SW34.Un1 SW34.Un2 SW34.Un3 SW35.Un1 SW35.Un2 SW35.Un3 SW36.Un1 SW36.Un2 SW36.Un3 SW37.Un1 SW37.Un2 SW37.Un3 SW38.Un1 SW38.Un2 SW38.Un3 SW39.Un1 SW39.Un2 SW39.Un3 SW40.Un1 SW40.Un2 SW40.Un3 SW41.Un1 SW41.Un2 SW41.Un3 SW42.Un1 SW42.Un2 SW42.Un3 SW43.Un1 SW43.Un2 SW43.Un3 SW43.Un4 SW43.Un5 SW43.Un6 SW43.Un7 SW44.Un1 SW44.Un2 SW44.Un3 SW45.Un1 SW45.Un2 SW45.Un3 SW45.Un4 SW45.Un5 SW45.Un6 SW45.Un7 SW46.Un1 SW46.Un2 SW46.Un3 SW47.Un1 SW47.Un2 SW47.Un3 SW48.Un1 SW48.Un2 SW48.Un3 SW49.Un1 SW49.Un2 SW49.Un3 SW50.Un1 SW50.Un2 SW50.Un3 SW51.Un1 SW51.Un2 SW51.Un3 SW52.Un1 SW52.Un2 SW52.Un3 SW53.Un1 SW53.Un2 SW53.Un3 SW54.Un1 SW54.Un2 SW54.Un3 SW55.Un1 SW55.Un2 SW55.Un3 SW56.Un1 SW56.Un2 SW56.Un3 SW57.Un1 SW57.Un2 SW57.Un3 SW58.Un1 SW58.Un2 SW58.Un3 SW59.Un1 SW59.Un2 SW59.Un3 SW60.Un1 SW60.Un2 SW60.Un3 SW61.Un1 SW61.Un2 SW61.Un3 SW62.Un1 SW62.Un2 SW62.Un3 SW62.Un4 SW62.Un5 SW62.Un6 SW62.Un7 SW63.Un1 SW63.Un2 SW63.Un3 SW64.Un1 SW64.Un2 SW64.Un3 SW65.Un1 SW65.Un2 SW65.Un3 SW66.Un1 SW66.Un2 SW66.Un3 SW67.Un1 SW67.Un2 SW67.Un3 SW68.1 SW68.4 U1.12 U1.18 U1.42

## Silkscreen, mask and mechanical layers (free items; w line width, h text height)
Mechanical 1:
  the board outline again, w0

## Text inside footprints (layer, text, board x,y; h text height)
SW1: Mechanical 6 "%R" at 390.75,3713.17 h39.37
SW2: Mechanical 6 "%R" at 1140.71,3713.17 h39.37
SW3: Mechanical 6 "%R" at 1890.66,3713.17 h39.37
SW4: Mechanical 6 "%R" at 2640.61,3713.17 h39.37
SW5: Mechanical 6 "%R" at 3390.57,3713.17 h39.37
SW6: Mechanical 6 "%R" at 4140.52,3713.17 h39.37
SW7: Mechanical 6 "%R" at 4890.47,3713.17 h39.37
SW8: Mechanical 6 "%R" at 5640.42,3713.17 h39.37
SW9: Mechanical 6 "%R" at 6390.38,3713.17 h39.37
SW10: Mechanical 6 "%R" at 7140.33,3713.17 h39.37
SW11: Mechanical 6 "%R" at 7890.28,3713.17 h39.37
SW12: Mechanical 6 "%R" at 8640.23,3713.17 h39.37
SW13: Mechanical 6 "%R" at 9390.19,3713.17 h39.37
SW14: Mechanical 6 "%R" at 10515.12,3713.17 h39.37
SW15: Mechanical 6 "%R" at 11640.05,3713.17 h39.37
SW16: Mechanical 6 "%R" at 578.24,2963.22 h39.37
SW17: Mechanical 6 "%R" at 1515.68,2963.22 h39.37
SW18: Mechanical 6 "%R" at 2265.64,2963.22 h39.37
SW19: Mechanical 6 "%R" at 3015.59,2963.22 h39.37
SW20: Mechanical 6 "%R" at 3765.54,2963.22 h39.37
SW21: Mechanical 6 "%R" at 4515.49,2963.22 h39.37
SW22: Mechanical 6 "%R" at 5265.45,2963.22 h39.37
SW23: Mechanical 6 "%R" at 6015.4,2963.22 h39.37
SW24: Mechanical 6 "%R" at 6765.35,2963.22 h39.37
SW25: Mechanical 6 "%R" at 7515.31,2963.22 h39.37
SW26: Mechanical 6 "%R" at 8265.26,2963.22 h39.37
SW27: Mechanical 6 "%R" at 9015.21,2963.22 h39.37
SW28: Mechanical 6 "%R" at 9765.16,2963.22 h39.37
SW29: Mechanical 6 "%R" at 10702.6,2963.22 h39.37
SW30: Mechanical 6 "%R" at 11640.05,2963.22 h39.37
SW31: Mechanical 6 "%R" at 671.99,2213.26 h39.37
SW32: Mechanical 6 "%R" at 1703.17,2213.26 h39.37
SW33: Mechanical 6 "%R" at 2453.12,2213.26 h39.37
SW34: Mechanical 6 "%R" at 3203.08,2213.26 h39.37
SW35: Mechanical 6 "%R" at 3953.03,2213.26 h39.37
SW36: Mechanical 6 "%R" at 4702.98,2213.26 h39.37
SW37: Mechanical 6 "%R" at 5452.94,2213.26 h39.37
SW38: Mechanical 6 "%R" at 6202.89,2213.26 h39.37
SW39: Mechanical 6 "%R" at 6952.84,2213.26 h39.37
SW40: Mechanical 6 "%R" at 7702.79,2213.26 h39.37
SW41: Mechanical 6 "%R" at 8452.75,2213.26 h39.37
SW42: Mechanical 6 "%R" at 9202.7,2213.26 h39.37
SW43: Mechanical 6 "%R" at 10327.63,2213.26 h39.37
SW44: Mechanical 6 "%R" at 11452.56,2213.26 h39.37
SW45: Mechanical 6 "%R" at 765.73,1463.31 h39.37
SW46: Mechanical 6 "%R" at 1890.66,1463.31 h39.37
SW47: Mechanical 6 "%R" at 2640.61,1463.31 h39.37
SW48: Mechanical 6 "%R" at 3390.57,1463.31 h39.37
SW49: Mechanical 6 "%R" at 4140.52,1463.31 h39.37
SW50: Mechanical 6 "%R" at 4890.47,1463.31 h39.37
SW51: Mechanical 6 "%R" at 5640.42,1463.31 h39.37
SW52: Mechanical 6 "%R" at 6390.38,1463.31 h39.37
SW53: Mechanical 6 "%R" at 7140.33,1463.31 h39.37
SW54: Mechanical 6 "%R" at 7890.28,1463.31 h39.37
SW55: Mechanical 6 "%R" at 8640.23,1463.31 h39.37
SW56: Mechanical 6 "%R" at 9671.42,1463.31 h39.37
SW57: Mechanical 6 "%R" at 10702.6,1463.31 h39.37
SW58: Mechanical 6 "%R" at 11452.56,1463.31 h39.37
SW59: Mechanical 6 "%R" at 578.24,713.36 h39.37
SW60: Mechanical 6 "%R" at 1609.43,713.36 h39.37
SW61: Mechanical 6 "%R" at 2640.61,713.36 h39.37
SW62: Mechanical 6 "%R" at 5546.68,713.36 h39.37
SW63: Mechanical 6 "%R" at 8359,713.36 h39.37
SW64: Mechanical 6 "%R" at 9202.7,713.36 h39.37
SW65: Mechanical 6 "%R" at 9952.65,713.36 h39.37
SW66: Mechanical 6 "%R" at 10702.6,713.36 h39.37
SW67: Mechanical 6 "%R" at 11452.56,713.36 h39.37